# Altium PCB BINARY WATCH.PcbDoc
Units mm, origin at the board's own origin, x right, y up, seen from the top; angles counter-clockwise.
Board outline 40.05 x 54.05 mm, 2 copper layers (Top Layer, Bottom Layer); 32 components, 24 nets, 122 pads, 58 vias.
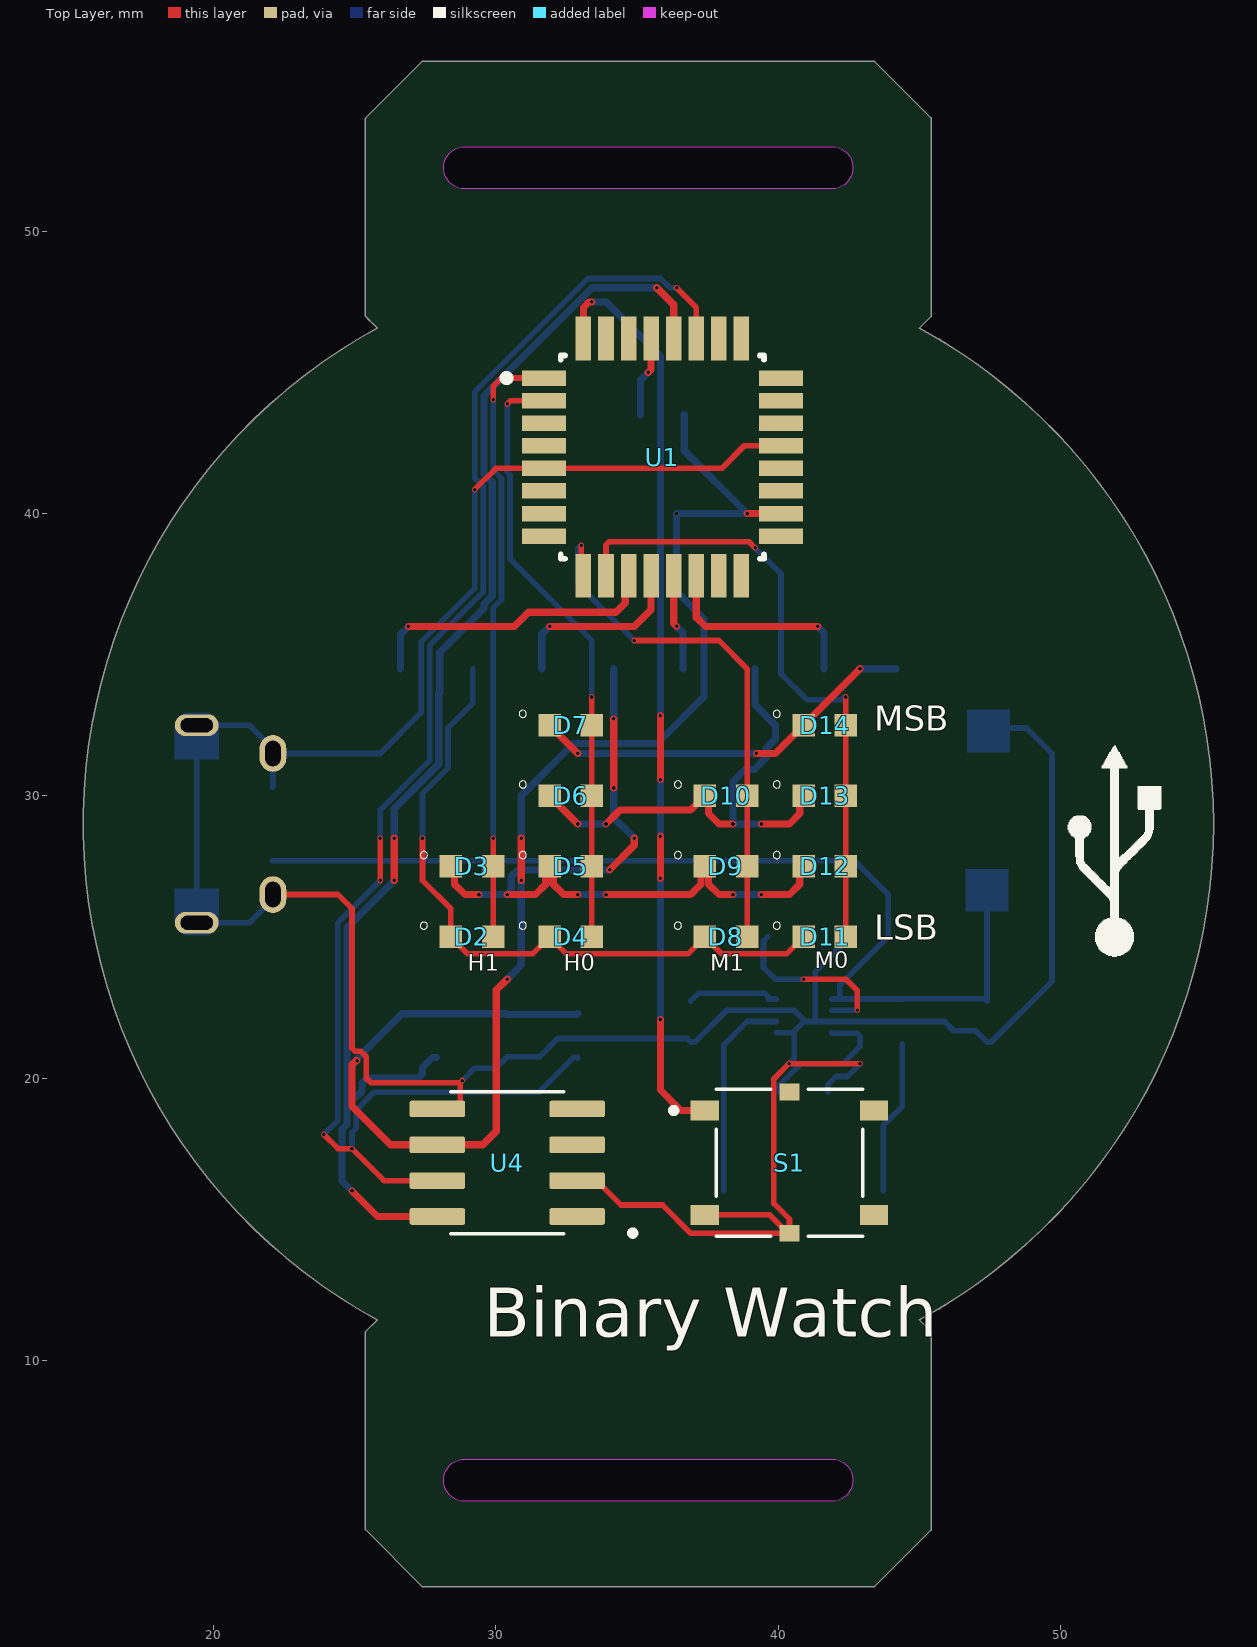
[diagram p0: Top Layer view]
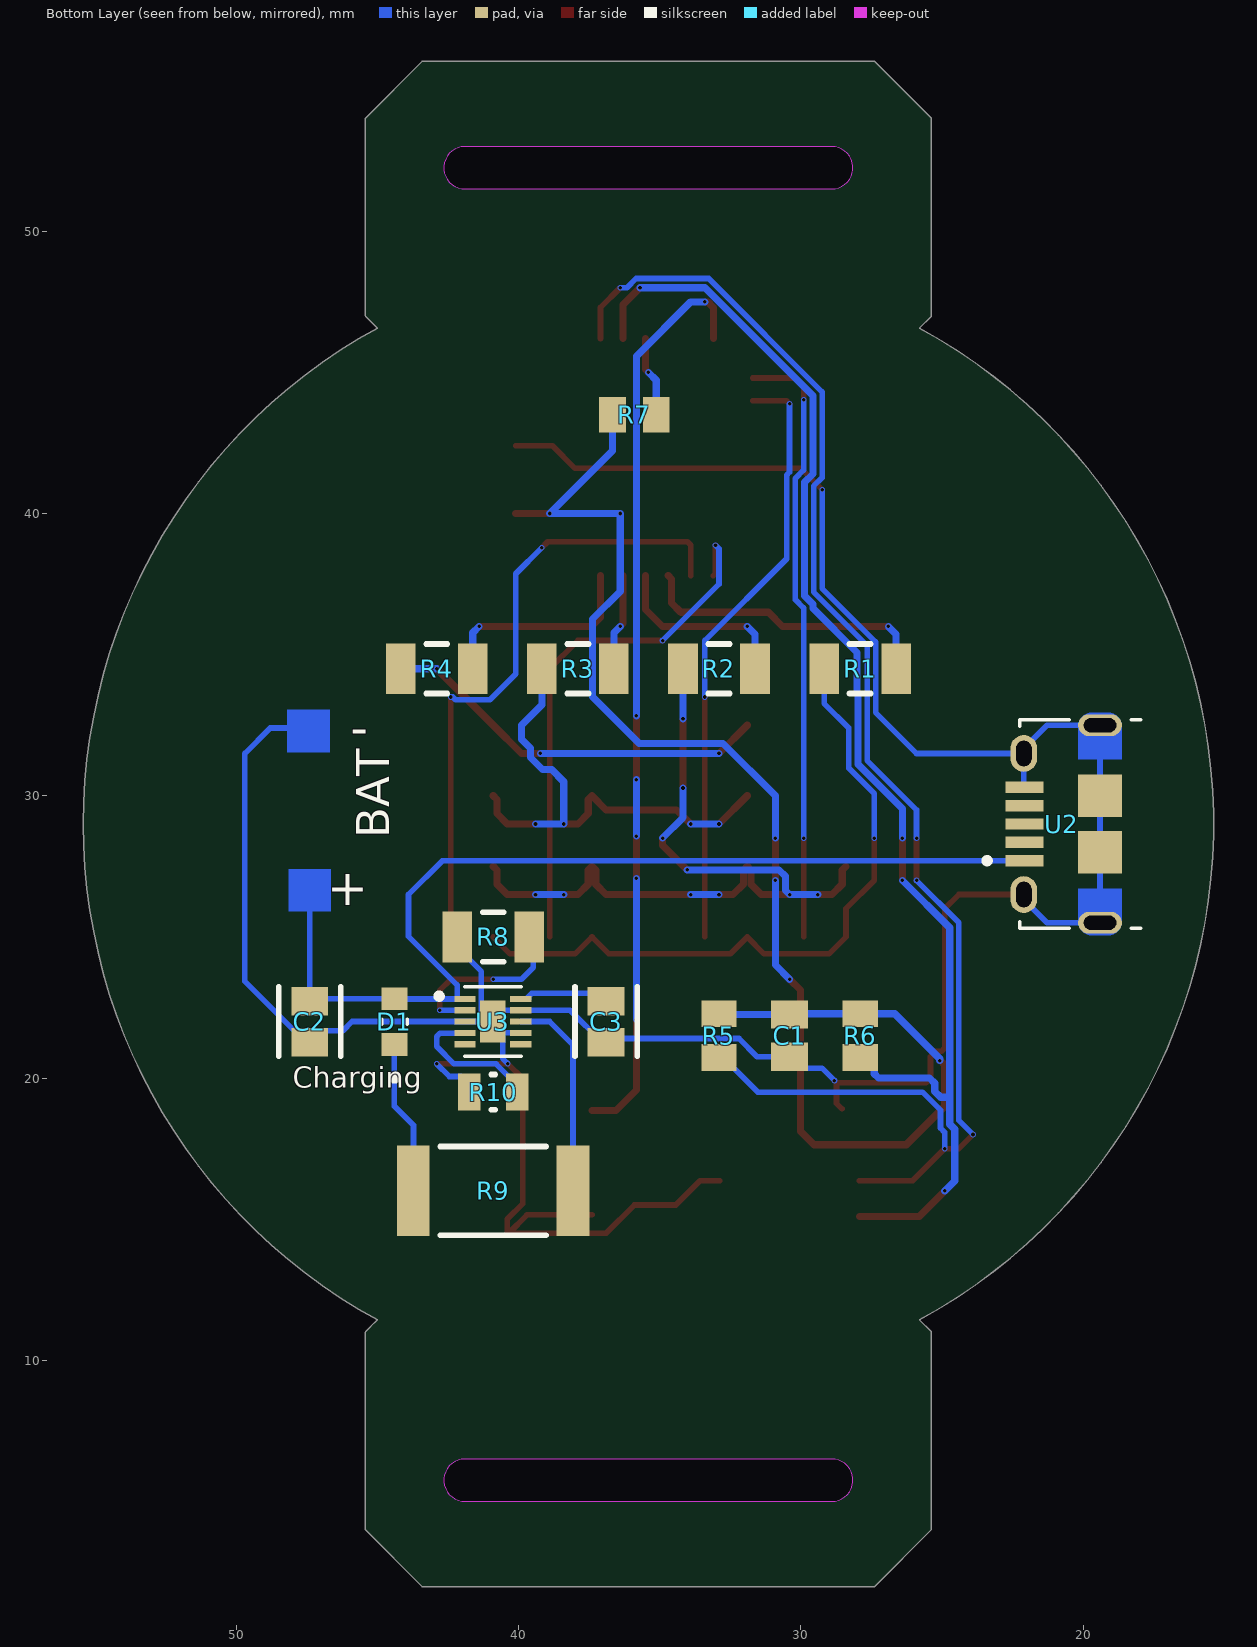
[diagram p1: Bottom Layer view, seen from below]
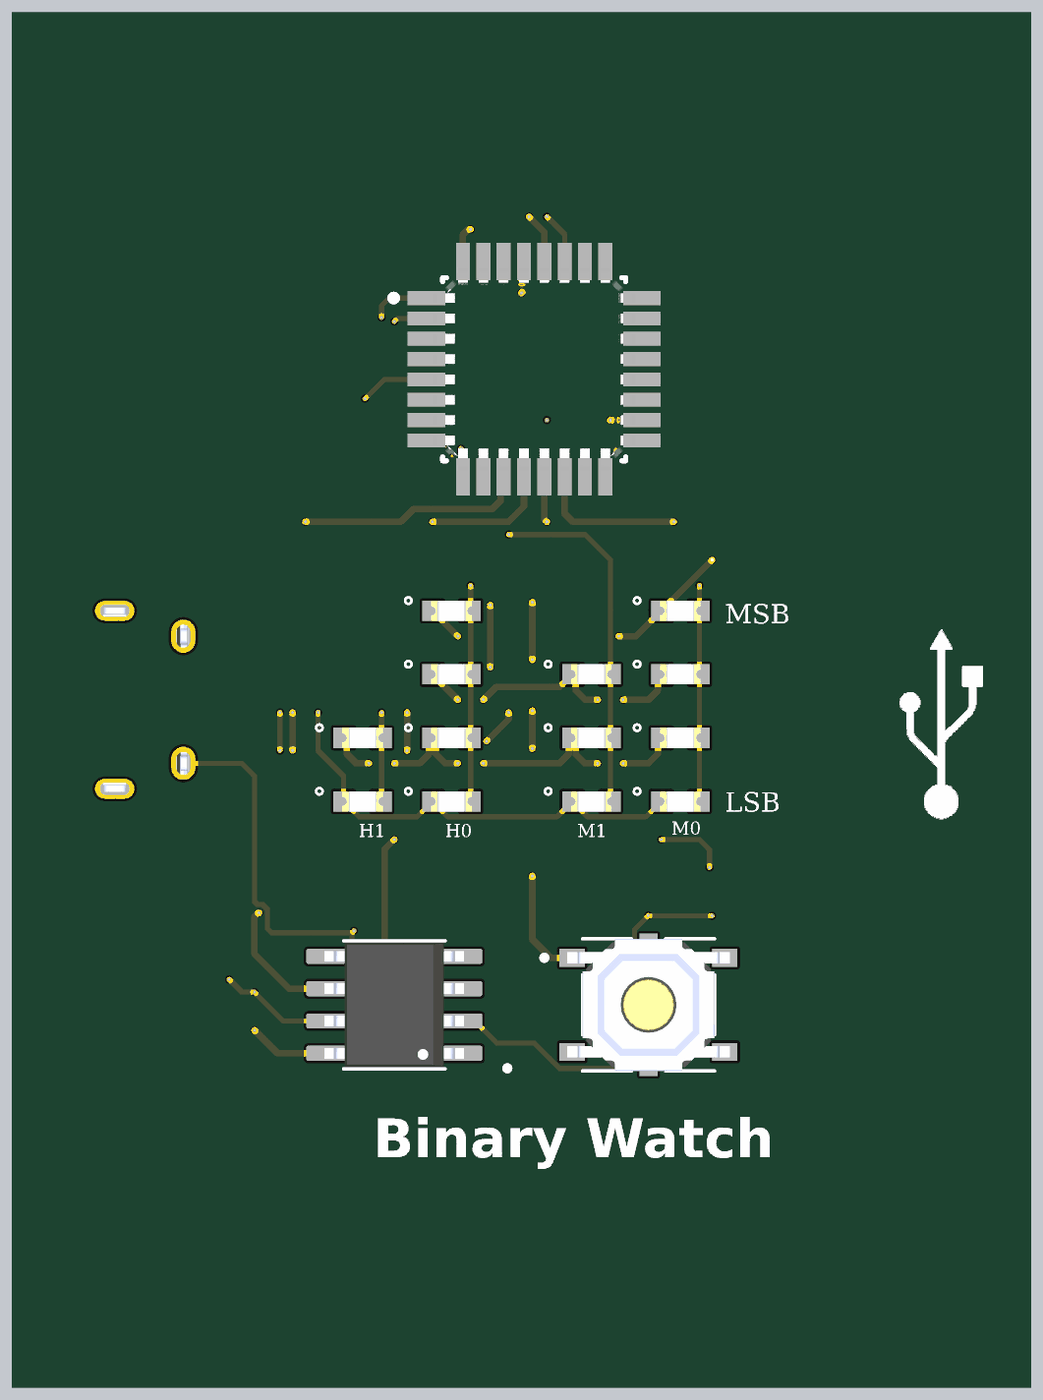
[diagram p2: 3D render of the assembled board from above, using the file's embedded part models]
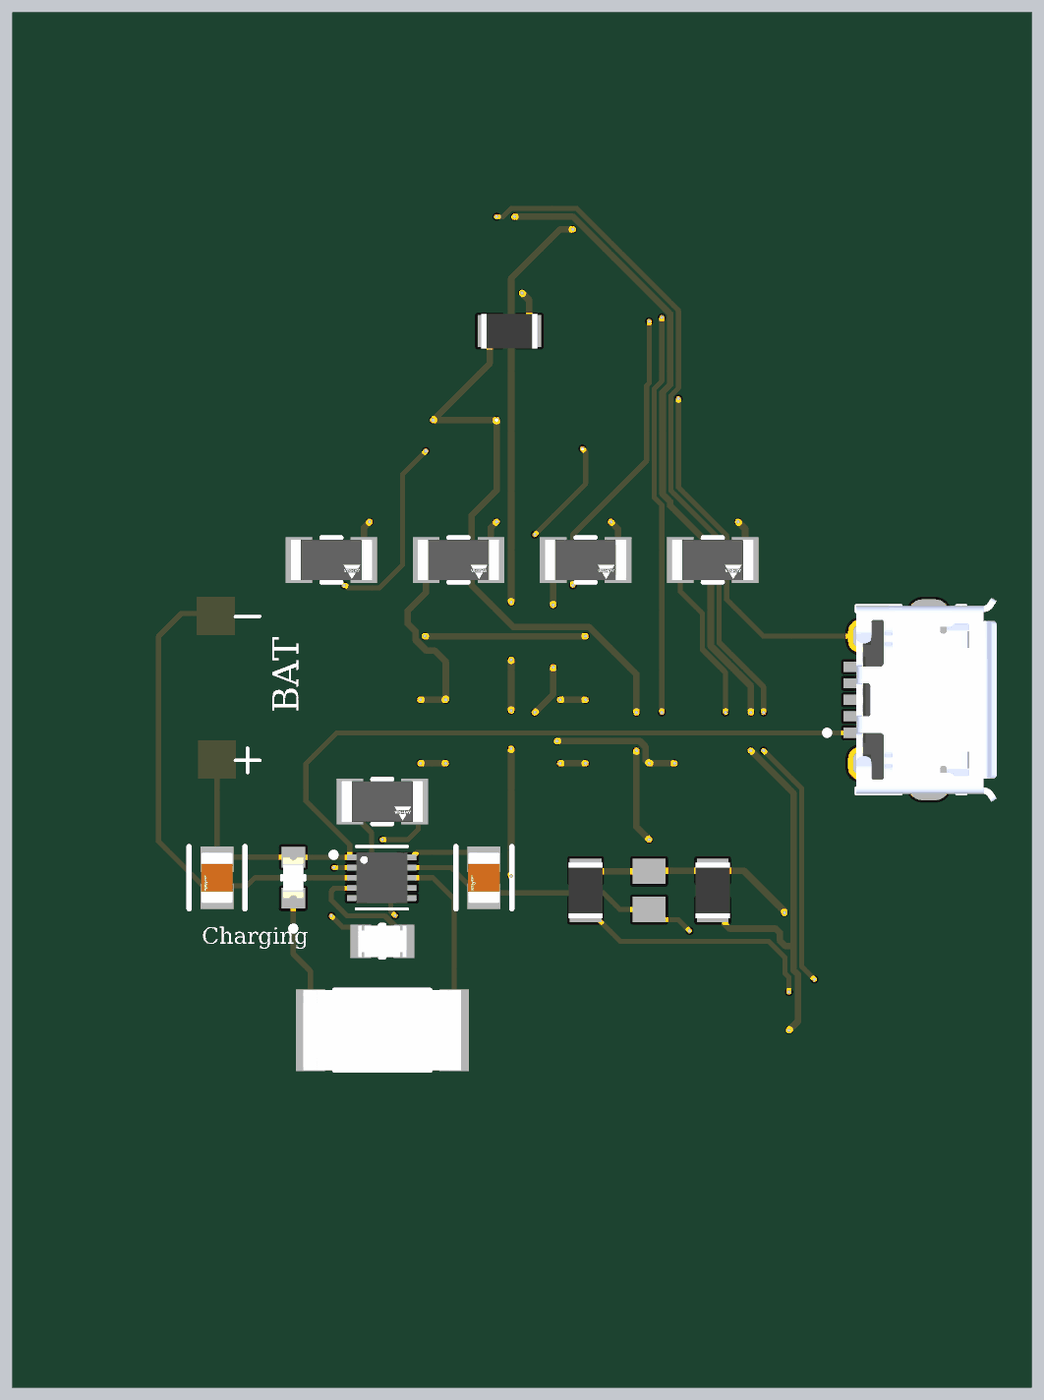
[diagram p3: 3D render of the assembled board from below, using the file's embedded part models]

## Layer stack, top to bottom
Top Solder: solder mask 0.0102, Solder Resist, Dk 3.5
Top Layer: signal copper 0.0356
Dielectric 1: dielectric 0.32, FR-4, Dk 4.8
Bottom Layer: signal copper 0.0356
Bottom Solder: solder mask 0.0102, Solder Resist, Dk 3.5

## Board outline
25.374,4 25.374,11 25.382,11.018 25.793,11.429 cw(c35.4,29) 25.793,46.571 25.382,46.982 25.532,46.832 25.374,47 25.374,54 25.382,54.018 27.382,56.018 27.4,56.026 43.4,56.026 43.418,56.018 45.418,54.018 45.426,54 45.426,47 45.418,46.982 45.007,46.571 cw(c35.4,29) 55.426,29 cw(c35.4,29) 45.007,11.429 45.243,11.193 45.268,11.168 45.418,11.018 45.426,11 45.426,4 45.418,3.982 43.418,1.982 43.4,1.974 27.4,1.974 27.382,1.982
cut-out: 28.9,5 cw(c28.9,5.75) 28.902,6.5 41.9,6.5 cw(c41.9,5.75) 41.898,5
cut-out: 28.9,51.5 cw(c28.9,52.25) 28.902,53 41.9,53 cw(c41.9,52.25) 41.898,51.5

## Design rules (kind name [scope] priority, off if disabled: settings)
Clearance [All] p1: gap=0.1 ignorepadtopadclearanceinfootprint=FALSE
PolygonConnect [All] p1: connectstyle=Relief reliefconductorwidth=0.254 reliefentries=4 polygonreliefangle="90 Angle" airgapwidth=0.254
RoutingVias [All] p1: holewidth=0.711 width=1.27 viastyle="Through Hole" minholewidth=0.1 minwidth=0.1 maxholewidth=0.711 maxwidth=1.27
SolderMaskExpansion [All] p1: expansion=0.102 istentingtop=FALSE
Width [All] p1: maxlimit=1 minlimit=0.2 preferedwidth=0.254
30 further rules are at their usual default settings.

## Components (designator, comment, footprint, x,y, rotation, side; value= is the part's Value field where it differs from the comment)
C1 "1u" CAPC2013X135X45LL10T25 30.4,21.5 r270 bottom
C2 "10u" FP-GCM21B-0_15-IPC_C 47.4,22 r270 bottom
C3 "10u" FP-GCM21B-0_15-IPC_C 36.9,22 r270 bottom
D1 "LTST-C190KRKT" LEDC1608X35N 44.4,22 r90 bottom
D2 "LTST-C190GKT" LEDM1608X80 29.15,25 r0 top locked
D3 "LTST-C190GKT" LEDM1608X80 29.15,27.5 r0 top locked
D4 "LTST-C190GKT" LEDM1608X80 32.65,25 r0 top locked
D5 "LTST-C190GKT" LEDM1608X80 32.65,27.5 r0 top locked
D6 "LTST-C190GKT" LEDM1608X80 32.65,30 r0 top locked
D7 "LTST-C190GKT" LEDM1608X80 32.65,32.5 r0 top locked
D8 "LTST-C190GKT" LEDM1608X80 38.15,25 r0 top locked
D9 "LTST-C190GKT" LEDM1608X80 38.15,27.5 r0 top locked
D10 "LTST-C190GKT" LEDM1608X80 38.15,30 r0 top locked
D11 "LTST-C190GKT" LEDM1608X80 41.65,25 r0 top locked
D12 "LTST-C190GKT" LEDM1608X80 41.65,27.5 r0 top locked
D13 "LTST-C190GKT" LEDM1608X80 41.65,30 r0 top locked
D14 "LTST-C190GKT" LEDM1608X80 41.65,32.5 r0 top locked
R1 "100" FP-CRCW1206-e3-MFG 27.9,34.5 r180 bottom
R2 "100" FP-CRCW1206-e3-MFG 32.9,34.5 r180 bottom
R3 "100" FP-CRCW1206-e3-MFG 37.9,34.5 r180 bottom
R4 "100" FP-CRCW1206-e3-MFG 42.9,34.5 r180 bottom
R5 "4.7" RESC2013X70X40LL20T20 32.9,21.5 r90 bottom
R6 "4.7" RESC2013X70X40LL20T20 27.9,21.5 r90 bottom
R7 "4.7" RESC2013X70X40LL20T20 35.9,43.5 r0 bottom
R8 "1.2k" FP-CRCW1206-e3-MFG 40.9,25 r180 bottom
R9 "1k" FP-CRCW2512-e3-IPC_C 40.9,16 r180 bottom
R10 "" FP-CRCW0805-e3-IPC_C 40.9,19.5 r180 bottom
S1 "" SW_PTS526_SMG15_SMTR2_LFS 40.4,17 r0 top locked
U1 "ATMEGA328PB-AUR" FP-C04-074-MFG 35.9,42 r0 top
U2 "10118194-0001LF" AMPHENOL_10118194-0001LF 19.4,29 r90 bottom locked
U3 "BQ24040DSQR" SON40P200X200X80-11N 40.915,22 r180 bottom
U4 "DS3231MZ+" SOIC127P600X175-8N 30.4,17 r180 top locked

## Footprints (in the part's own frame and the unit in brackets; to place one, negate y for a bottom-side part, rotate by r counter-clockwise, add the part's x,y. Pads: shape width x height; smd on the part's side, far side on the other; paste and mask are expansions set on the pad)
AMPHENOL_10118194-0001LF [mm]
  rect 0.4x1.35 smd: 1(-1.3,2.675) 2(-0.65,2.675) 3(0,2.675) 4(0.65,2.675) 5(1.3,2.675)
  oval 0.775x1.55 hole 0.5 slot 1.15 at 90 deg mask+0: SH1(-3.5,0) SH4(3.5,0)
  rect 1.5x1.55 smd: SH2(1,0) SH3(-1,0)
  oval 1.3x0.95 hole 0.55 slot 0.9 at 0 deg: SH5(-2.5,2.7) SH6(2.5,2.7)
  Top Layer region: 3.471,0.774 3.497,0.772 3.523,0.769 3.549,0.764 3.574,0.758 3.6,0.751 3.624,0.742 3.648,0.732 3.672,0.721 3.695,0.708 3.717,0.694 3.739,0.68 3.76,0.664 3.78,0.647 3.799,0.629 3.817,0.61 3.834,0.59 3.85,0.569 3.864,0.547 3.878,0.525 3.891,0.502 3.902,0.478 3.912,0.454 3.921,0.43 3.928,0.404 3.934,0.379 3.939,0.353 3.942,0.327 3.944,0.301 3.945,0.275 3.945,-0.275 3.944,-0.301 3.942,-0.327 3.939,-0.353 3.934,-0.379 3.928,-0.404 3.921,-0.43 3.912,-0.454 3.902,-0.478 3.891,-0.502 3.878,-0.525 3.864,-0.547 3.85,-0.569 3.834,-0.59 3.817,-0.61 3.799,-0.629 3.78,-0.647 3.76,-0.664 3.739,-0.68 3.717,-0.694 3.695,-0.708 3.672,-0.721 3.648,-0.732 3.624,-0.742 3.6,-0.751 3.574,-0.758 3.549,-0.764 3.523,-0.769 3.497,-0.772 3.471,-0.774 3.445,-0.775 2.3,-0.775 2.3,0.775 3.445,0.775
  Top Layer region: -2.3,-0.775 -3.445,-0.775 -3.471,-0.774 -3.497,-0.772 -3.523,-0.769 -3.549,-0.764 -3.574,-0.758 -3.6,-0.751 -3.624,-0.742 -3.648,-0.732 -3.672,-0.721 -3.695,-0.708 -3.717,-0.694 -3.739,-0.68 -3.76,-0.664 -3.78,-0.647 -3.799,-0.629 -3.817,-0.61 -3.834,-0.59 -3.85,-0.569 -3.864,-0.547 -3.878,-0.525 -3.891,-0.502 -3.902,-0.478 -3.912,-0.454 -3.921,-0.43 -3.928,-0.404 -3.934,-0.379 -3.939,-0.353 -3.942,-0.327 -3.944,-0.301 -3.945,-0.275 -3.945,0.275 -3.944,0.301 -3.942,0.327 -3.939,0.353 -3.934,0.379 -3.928,0.404 -3.921,0.43 -3.912,0.454 -3.902,0.478 -3.891,0.502 -3.878,0.525 -3.864,0.547 -3.85,0.569 -3.834,0.59 -3.817,0.61 -3.799,0.629 -3.78,0.647 -3.76,0.664 -3.739,0.68 -3.717,0.694 -3.695,0.708 -3.672,0.721 -3.648,0.732 -3.624,0.742 -3.6,0.751 -3.574,0.758 -3.549,0.764 -3.523,0.769 -3.497,0.772 -3.471,0.774 -3.445,0.775 -2.3,0.775
  silkscreen extent -3.7,-1.45 3.7,4.1, body extent -4.02,-2.68 4.02,2.85, height 2.67
CAPC2013X135X45LL10T25 [mm] "Chip Capacitor, 2-Leads, Body 2.00x1.25mm, IPC High Density"
  rect 1x1.3 smd: 1(-0.75,0) 2(0.75,0)
  body extent -1.05,-0.67 1.05,0.68, height 1.35
FP-C04-074-MFG [mm]
  rect 1.55x0.55 smd paste+0 mask+0: 1(-4.2,2.8) 2(-4.2,2) 3(-4.2,1.2) 4(-4.2,0.4) 5(-4.2,-0.4) 6(-4.2,-1.2) 7(-4.2,-2) 8(-4.2,-2.8) 17(4.2,-2.8) 18(4.2,-2) 19(4.2,-1.2) 20(4.2,-0.4) 21(4.2,0.4) 22(4.2,1.2) 23(4.2,2) 24(4.2,2.8)
  rect 0.55x1.55 smd paste+0 mask+0: 9(-2.8,-4.2) 10(-2,-4.2) 11(-1.2,-4.2) 12(-0.4,-4.2) 13(0.4,-4.2) 14(1.2,-4.2) 15(2,-4.2) 16(2.8,-4.2) 25(2.8,4.2) 26(2,4.2) 27(1.2,4.2) 28(0.4,4.2) 29(-0.4,4.2) 30(-1.2,4.2) 31(-2,4.2) 32(-2.8,4.2)
  silkscreen extent -5.65,-3.6 3.6,3.6, body extent -5.07,-5.07 5.07,5.07, height 0.25
FP-CRCW0805-e3-IPC_C [mil]
  rect 31.75x51.5 smd paste+0 mask+0: 1(-33.5,0) 2(33.5,0)
  silkscreen extent -3,-25 3,25, body extent -39,-25 39,25, height 20
FP-CRCW1206-e3-MFG [mm]
  rect 1.05x1.8 smd paste+0 mask+0: 1(-1.275,0) 2(1.275,0)
  silkscreen extent -0.38,-0.87 0.38,0.87, body extent -1.6,-0.8 1.6,0.8, height 0.6
FP-CRCW2512-e3-IPC_C [mm]
  rect 1.155x3.208 smd paste+0 mask+0: 1(-2.826,0) 2(2.826,0)
  silkscreen extent -1.87,-1.58 1.87,1.58, body extent -3.15,-1.58 3.15,1.58, height 0.7
FP-GCM21B-0_15-IPC_C [mm]
  rect 1.006x1.308 smd paste+0 mask+0: 1(-0.726,0) 2(0.726,0)
  silkscreen extent -1.23,-1.1 1.23,1.1, body extent -1,-0.63 1,0.63, height 1.4
LEDC1608X35N [mm]
  rect 0.81x0.93 smd: A(0.81,0) C(-0.81,0)
  silkscreen extent -2.1,-0.45 0.09,0.45, body extent -0.8,-0.4 0.8,0.4, height 0.8
LEDM1608X80 [mm]
  rect 0.8x0.8 smd: A(0.75,0) C(-0.75,0)
  silkscreen extent -1.83,0.27 -1.57,0.53, body extent -0.8,-0.4 0.8,0.4, height 0.8
RESC2013X70X40LL20T20 [mm] "Chip Resistor, 2-Leads, Body 2.2x1.35mm, IPC High Density"
  rect 0.95x1.25 smd: 1(-0.775,0) 2(0.775,0)
  body extent -1.1,-0.67 1.1,0.67, height 0.7
SOIC127P600X175-8N [mm]
  rrect25% 1.97x0.59 smd: 1(-2.475,1.905) 2(-2.475,0.635) 3(-2.475,-0.635) 4(-2.475,-1.905) 5(2.475,-1.905) 6(2.475,-0.635) 7(2.475,0.635) 8(2.475,1.905)
  silkscreen extent -4.54,-2.52 2,2.59, body extent -3,-2.45 3,2.45, height 1.51
SON40P200X200X80-11N [mm]
  rect 0.76x0.22 smd: 1(-0.985,0.8) 2(-0.985,0.4) 3(-0.985,0) 4(-0.985,-0.4) 5(-0.985,-0.8) 6(0.985,-0.8) 7(0.985,-0.4) 8(0.985,0) 9(0.985,0.4) 10(0.985,0.8)
  rect 0.9x1.5 smd paste-2: 11(0,0)
  silkscreen extent -2,-1.23 1,1.23, body extent -1,-1 1,1, height 0.76
SW_PTS526_SMG15_SMTR2_LFS [mm]
  rect 1x0.7 smd: 1(-3,1.85) 2(3,1.85) 3(-3,-1.85) 4(3,-1.85)
  rect 0.7x0.6 smd: G1(0,2.5) G2(0,-2.5)
  silkscreen extent -4.2,-2.6 2.6,2.6, body extent -3.2,-2.6 3.2,2.6, height 1.7

## Part data
C1: library part CMP-2007-03460-1, Manufacturer=Murata, Part Number=GRM21BR71C105KA01K
C2 C3: library part CMP-2007-03335-2, "Ceramic Capacitor for Automotive 10uF ±10% 6.3VDC X7R 0805 Embossed T/R", Capacitance=10uF, Case Code (Imperial)=0805, Case Code (Metric)=2012, Dielectric=X7R, Max Operating Temperature=125°C, Min Operating Temperature=-55°C, Package Quantity=1, Ratings=AEC-Q200, Tolerance=10%, Voltage=6.3V, Case/Package=0805, Depth=1.25mm, Height=1.25mm, Lead Free="Lead Free", Length=2mm, Mount="Surface Mount", Packaging="Tape and Reel", Radiation Hardening=No, REACH SVHC="No SVHC", Termination=SMD/SMT, Thickness=0.055inch, Voltage Rating=6.3V, Voltage Rating (DC)=6.3V, Width=0.049inch
D1: "Red 631nm LED Indication - Discrete 2V 0603 (1608 Metric)", Package="0603 Lite-On", Availability="In Stock", Check_prices=https://www.snapeda.com/parts/LTST-C190KRKT/Lite-On+Inc./view-part/?ref=eda, MF="Lite-On Inc.", MP=LTST-C190KRKT, Price=None, Purchase-URL=https://pricing.snapeda.com/search/part/LTST-C190KRKT/?ref=eda, SnapEDA_Link=https://www.snapeda.com/parts/LTST-C190KRKT/Lite-On+Inc./view-part/?ref=snap
D2 D3 D4 D5 D6 D7 D8 D9 D10 D11 D12 D13 D14: "Green 1.6 x 0.8 x 0.8 mm 130Â° Water Clear 6 mcd 2.1 V SMT LED", Package=None, Availability=Unavailable, MP=LTST-C190GKT, Price=None
R1 R2 R3 R4: library part CMP-2003-04801-2, "RES Thick Film, 100Ω, 1%, 0.25W, 100ppm/°C, 1206", Case Code (Imperial)=1206, Case Code (Metric)=3216, Max Operating Temperature=155°C, Min Operating Temperature=-55°C, Package Quantity=5000, Power Rating=250mW, Resistance=100R, Temperature Coefficient=100ppm/°C, Tolerance=1%, Voltage Rating=200V, Case/Package=1206, Composition="Thick Film", Contact Plating=Tin, Depth=1.6mm, Height=0.55mm, Lead Free="Lead Free", Length=3.2mm, Military Standard=Not, Mount="Surface Mount", Number of Pins=2, Packaging="Tape and Reel", Radiation Hardening=No, Termination=SMD/SMT, Voltage Rating (DC)=200V, Weight=0.000353oz, Width=1.6mm
R5 R6 R7: library part CMP-1665-00033-1, "Chip Resistor, 4.7 Ohm, +/- 1%, 125 mW, -55 to 125 degC, 0805 (2012 Metric), RoHS, Tape and Reel", Case Code (Imperial)=0805, Case Code (Metric)=2012, Max Operating Temperature="125 degC", Min Operating Temperature="-55 degC", Package Quantity=5000, PartNumber=ERJ-6RQF4R7V, Power Rating="125 mW", Resistance="4.7 Ohm", Tolerance=1%, Case\/Package=0805, ComponentLink1Description="Manufacturer URL", ComponentLink1URL=http://www.panasonic.com/, ComponentLink2Description=Datasheet, ComponentLink2URL=http://industrial.panasonic.com/cdbs/www-data/pdf/RDA0000/AOA0000C86.pdf, DatasheetVersion=04/2015, Height="0.028 inch", Length="0.079 inch", Mount="Surface Mount", Mounting Technology="Surface Mount", PackageDescription="2-Pin Surface Mount Device, Body 2 x 1.5 mm", PackageReference=0805, Packaging="Tape and Reel", Pins=2, Radiation Hardening=No, REACH SVHC="No SVHC", RoHSCompliant=true, Width="0.049 inch"
R8: library part CMP-2003-01876-2, "RES Thick Film, 1.2kΩ, 1%, 0.25W, 100ppm/°C, 1206", Case Code (Imperial)=1206, Case Code (Metric)=3216, Max Operating Temperature=155°C, Max Power Dissipation=250mW, Min Operating Temperature=-55°C, Package Quantity=10, Resistance=1.2kR, Temperature Coefficient=100ppm/°C, Tolerance=1%, Voltage Rating=200V, Case/Package=1206, Composition="Thick Film", Contact Plating=Tin, Depth=1.6mm, Features="Automotive AEC-Q200", Height=0.55mm, Lead Free="Lead Free", Length=3.2mm, Military Standard=Not, Number of Terminations=2, Packaging="Tape and Reel", Power Rating=250mW, Radiation Hardening=No, Termination=SMD/SMT, Voltage Rating (DC)=200V, Weight=0.000353oz, Width=0.063inch, Working Voltage=200V
R9: library part CMP-02407-005880-1, "RES Thick Film, 1kΩ, 1%, 1W, 100ppm/°C, 2512", Case Code (Imperial)=2512, Case Code (Metric)=6432, Max Operating Temperature=155°C, Max Power Dissipation=1W, Min Operating Temperature=-55°C, Package Quantity=10, Resistance=1kR, Temperature Coefficient=100ppm/°C, Tolerance=1%, Voltage Rating=500V, Case/Package=2512, Composition="Thick Film", Contact Plating=Tin, Depth=3.15mm, Features="Automotive AEC-Q200", Height=0.6mm, Lead Free="Lead Free", Length=6.3mm, Military Standard=Not, Mount="Surface Mount", Number of Pins=2, Number of Terminations=2, Packaging="Tape and Reel", Power Rating=1W, Radiation Hardening=No, Termination=SMD/SMT, Voltage Rating (DC)=500V, Weight=0.001429oz, Width=3.15mm
R10: library part CMP-2001-04910-2, "RES Thick Film, 10kΩ, 5%, 0.125W, 200ppm/°C, 0805", Case Code (Imperial)=0805, Case Code (Metric)=2012, Max Operating Temperature=155°C, Min Operating Temperature=-55°C, Package Quantity=5000, Power Rating=125mW, Resistance=10kR, Temperature Coefficient=200ppm/°C, Tolerance=5%, Voltage Rating=150V, Case/Package=0805, Composition="Thick Film", Contact Plating=Tin, Depth=1.25mm, Height=0.45mm, Lead Free="Lead Free", Length=2mm, Military Standard=Not, Mount="Surface Mount", Packaging="Tape and Reel", Radiation Hardening=No, Termination=SMD/SMT, Voltage Rating (DC)=150V, Weight=0.000194oz, Width=1.25mm
S1: library part PTS526_SMG15_SMTR2_LFS, "Tactile Switch SPST-NO Top Actuated Surface Mount", Package=None, Availability="In Stock", Check_prices=https://www.snapeda.com/parts/PTS526%20SMG15%20SMTR2%20LFS/C%2526K/view-part/?ref=eda, MF=C&K, MP="PTS526 SMG15 SMTR2 LFS", Price=None, Purchase-URL="https://pricing.snapeda.com/search/part/PTS526 SMG15 SMTR2 LFS/?ref=eda", SnapEDA_Link=https://www.snapeda.com/parts/PTS526%20SMG15%20SMTR2%20LFS/C%2526K/view-part/?ref=snap
U1: library part CMP-06276-000006-1, "IC MCU 8BIT 32KB FLASH 32TQFP", Frequency=20MHz, Manufacturer=Microchip, Max Supply Voltage=5.5V, Min Supply Voltage=1.8V, Nominal Supply Current=0.06-5.2mA, Package=C04-074, Temperature="-40°C to +85°C", Temperature Range High=+85°C, Temperature Range Low=-40°C, Automotive=No, Category=IC, ComponentLink2Description=Datasheet, ComponentLink2URL=http://ww1.microchip.com/downloads/en/DeviceDoc/40001906C.pdf, Core Architecture=AVR, Data Bus Width=8bits, Device Class L1="Integrated Circuits (ICs)", Device Class L2="Embedded Processors and Controllers", Device Class L3=Microcontrollers, Digikey Description="IC MCU 8BIT 32KB FLASH 32TQFP", Footprint Url=https://ww1.microchip.com/downloads/en/DeviceDoc/32L_TQFP_7x7x1_0mm_PT_C04-00074c.pdf, Height=1.2mm, Interface=I2C,SPI,UART,USART,2-Wire, Ipc Land Pattern Name=QFP80P900X900X120-32, Lead Free=Yes, Manufacturer Part Number=ATMEGA328PB-AUR, Memory Size=32KBytes, Memory Type=FLASH, Number Of A/D Converters=1, Number Of Adc Channels=8, Number Of Cores=1, Number Of I2C Channels=2, Number Of I/Os=27, Number Of Pwm Channels=10, Number Of Spi Channels=2, Number Of Timers/Counters=5, Number Of Uart Channels=2, Octopart=https://octopart.com/atmega328pb-aur-microchip-77760229, Ram Size=2KBytes, RoHS=TRUE, Standoff Height=0.05mm
U2: "Micro USB, Input Output Connectors, B TYPE RECEPTACLE with flange", Package=None, Check_prices=https://www.snapeda.com/parts/10118194-0001LF/Amphenol+FCI/view-part/?ref=eda, MF="Amphenol ICC", MP=10118194-0001LF, SnapEDA_Link=https://www.snapeda.com/parts/10118194-0001LF/Amphenol+FCI/view-part/?ref=snap
U3: "Standalone 1-cell 1-A linear battery charger with 4.2-V VBAT and Temperature Sensing 10-WSON 0 to 125", Package="WSON-10 Texas Instruments", Digi-Key_Part_Number=296-37142-1-ND, DigiKey-Purchase-URL=https://snapeda.com/shop?store=DigiKey&id=229310, MF="Texas Instruments", Mouser-Purchase-URL=https://snapeda.com/shop?store=Mouser&id=229310, MP=BQ24040DSQR, SnapEDA_Link=https://www.snapeda.com/parts/BQ24040DSQR/Texas%20Instruments/view-part/229310/?ref=snap, Texas_Instruments-Purchase-URL=https://snapeda.com/shop?store=Texas+Instruments&id=229310
U4: "Real Time Clock _RTC_ IC Clock/Calendar IÂ²C, 2-Wire Serial 8-SOIC _0.154, 3.90mm Width_", Package="SOIC-8 Maxim Integrated", Availability=Unavailable, MF="Maxim Integrated", MP=DS3231MZ, Price=None, SnapEDA_Link=https://www.snapeda.com/parts/DS3231MZ/Maxim%20Integrated/view-part/2834343/?ref=snap

## Via types
v1: diameter 0.127, hole 0.127, Top Layer to Bottom Layer, 58 vias

## Nets (pads, with @x,y where several pads share a name; then routed paths per layer and width w, separated by ;. In a path a pad name is that pad's centre, name@x,y a point inside that pad or via, vN(x,y) a via of type N, cw(c..) or ccw(c..) an arc to the next point about the centre after c; other vN are vias at no path point)
+5V: C2.1 D1.A U2.1 U3.1 | length 36.1
  Bottom Layer w0.2: U2.1 42.7,27.7 43.9,26.5 43.9,25.017 42.18,23.297 42.18,22.81 U3.1@42.17,22.8 ; U3.1 U3.1@42.17,22.8 ; 47.4,26.5 C2.1 47.316,22.81 D1.A 44.39,22.8 U3.1@42.17,22.8
BIT1: R1.2 U1.11 | length 10.7
  Top Layer w0.254: v1(26.9,36) 30.65,36 31.15,36.5 34.251,36.5 34.585,36.834 34.585,37.685 U1.11
  Bottom Layer w0.254: R1.2 26.625,35.725 v1(26.9,36)
BIT2: R2.2 U1.12 | length 6.7
  Top Layer w0.254: v1(31.9,36) 34.9,36 35.5,36.6 U1.12
  Bottom Layer w0.254: R2.2 31.625,35.725 v1(31.9,36)
BIT3: R3.2 U1.13 | length 3.4
  Top Layer w0.254: U1.13 36.3,36.1 v1(36.4,36)
  Bottom Layer w0.254: v1(36.4,36) 36.625,35.775 R3.2
BIT4: R4.2 U1.14 | length 7.5
  Top Layer w0.254: U1.14 37.1,36.322 37.422,36 v1(41.4,36)
  Bottom Layer w0.254: v1(41.4,36) 41.625,35.775 R4.2
GND: C1.2 C2.2 C3.2 R8.1 R10.1 S1.3 S1.G2 U1.5 U1.21 U2.5 U2.SH1 U2.SH2 U2.SH3 U2.SH4 U2.SH5 U2.SH6 U3.3 U3.7 U3.9 U3.11 U4.2 U4.5 | length 117.1
  Top Layer w0.2: U2.SH1 U2.SH1@19.787,25.5 ; U2.SH5 24.4,26.5 24.9,26 24.9,21.062 25.017,20.944 25.216,20.944 25.408,20.753 25.408,19.992 25.564,19.836 28.736,19.836 ; U4.5@28.541,18.905 28.736,19.1 28.736,19.836 ; v1(28.81,19.91) 28.736,19.836 ; v1(29.246,40.846) 30,41.6 U1.5 38,41.6 38.8,42.4 U1.21 ; U4.2 33.565,16.365 34.43,15.5 35.9,15.5 36.9,14.5 S1.G2@40.35,14.5 ; S1.3 39.7,15.15 S1.G2@40.35,14.5 ; v1(42.9,20.5) 40.4,20.5 v1(40.388,20.512) 39.85,19.974 39.85,15.55 40.4,15 S1.G2 S1.G2@40.35,14.5
  Bottom Layer w0.2: U2.5 22.1,30.325 U2.SH6 ; U2.SH5 22.1,26.325 21.275,25.5 U2.SH1 U2.SH3 U2.SH2 U2.SH4 21.275,32.5 22.1,31.675 U2.SH6 ; v1(28.81,19.91) 29.25,20.35 30,20.35 C1.2 31.542,20.75 32.192,21.4 36.774,21.4 C3.2 37.051,21.274 38.177,22.4 U3.9 40.565,22.4 40.915,22.05 U3.11 ; v1(29.246,40.846) 29.246,37.346 27.35,35.45 27.35,32.95 25.9,31.5 U2.SH6 ; U3.7 U3.11@40.565,21.6 ; v1(40.388,20.512) 40.565,20.689 U3.11@40.565,21.6 ; R10.1 41.751,19.751 42.054,20.054 42.454,20.054 v1(42.9,20.5) ; R8.1 42.175,24.625 41.32,23.77 41.32,22.088 41.408,22 ; 47.3,32.4 48.8,32.4 49.7,31.5 49.7,23.423 47.551,21.274 C2.2 46.997,21.677 46.223,21.677 45.9,22 U3.3 41.408,22 ; U3.11@40.565,21.6 40.565,21.65 U3.11 ; U3.11 41.408,22
H0: D4.A D5.A D6.A D7.A U1.2 | length 21.5
  Top Layer w0.2: v1(30.4,43.883) 30.517,44 U1.2 ; D4.A D5.A D6.A D7.A v1(33.4,33.5)
  Bottom Layer w0.2: v1(30.4,43.883) 30.4,41.465 30.5,41.365 30.5,38.4 33.4,35.5 v1(33.4,33.5)
H1: D2.A D3.A U1.1 | length 21.7
  Top Layer w0.2: D2.A D3.A v1(29.9,28.5) ; v1(29.9,44.038) 29.9,44.5 30.2,44.8 U1.1
  Bottom Layer w0.2: v1(29.9,28.5) 29.9,36.5 29.9,36.651 30.2,36.951 30.2,41.241 29.9,41.541 v1(29.9,44.038)
M0: D11.A D12.A D13.A D14.A U1.10 | length 22.6
  Top Layer w0.2: U1.10 33.9,38.883 34.017,39 38.967,39 v1(39.184,38.784) ; D11.A D12.A D13.A D14.A v1(42.4,33.5)
  Bottom Layer w0.2: v1(39.184,38.784) 40.1,37.867 40.1,34.317 41.017,33.4 42.233,33.4 42.333,33.5 v1(42.4,33.5)
M1: D8.A D9.A D10.A U1.9 | length 19.3
  Top Layer w0.2: v1(33.025,38.875) 33.025,37.875 U1.9 ; v1(34.9,35.5) 37.9,35.5 38.9,34.5 D10.A D9.A D8.A
  Bottom Layer w0.2: v1(33.025,38.875) 32.9,38.75 32.9,37.5 v1(34.9,35.5)
NetC3_1: C3.1 U3.10 | length 3.3
  Bottom Layer w0.2: C3.1 37.174,23 39.533,23 39.65,22.883 39.65,22.81 39.66,22.8 U3.10
NetD1_C: D1.C R9.1 | length 5.5
  Bottom Layer w0.2: R9.1 43.726,18.326 44.4,19 D1.C
NetD2_C: D2.C D4.C D8.C D11.C R1.1 | length 24.6
  Top Layer w0.2: v1(27.4,28.5) 27.4,27 28.4,26 D2.C 29,24.4 31.3,24.4 D4.C 32.5,24.4 36.8,24.4 D8.C 38,24.4 40.3,24.4 D11.C
  Bottom Layer w0.2: v1(27.4,28.5) 27.4,30.075 28.304,30.979 28.304,32.404 29.175,33.275 R1.1
NetD3_C: D3.C D5.C D9.C D12.C R2.1 | length 28.8
  Top Layer w0.254: D3.C 28.532,27.368 28.532,26.868 28.9,26.5 v1(29.4,26.5) ; v1(30.4,26.5) 31.4,26.5 31.768,26.868 31.768,27.368 D5.C 32.032,27.368 32.032,26.868 32.4,26.5 v1(32.9,26.5) ; v1(33.9,26.5) 36.9,26.5 37.268,26.868 37.268,27.368 D9.C 37.532,27.368 37.532,26.868 37.9,26.5 v1(38.4,26.5) ; v1(34.027,27.373) 34.9,28.246 v1(34.9,28.5) ; v1(34.175,30.276) v1(34.175,32.725) ; v1(39.4,26.5) 40.4,26.5 40.768,26.868 40.768,27.368 D12.C
  Bottom Layer w0.254: v1(29.4,26.5) v1(30.4,26.5) 30.546,26.646 30.546,27.147 30.772,27.373 v1(34.027,27.373) ; v1(32.9,26.5) v1(33.9,26.5) ; v1(34.175,30.276) 34.175,29.225 v1(34.9,28.5) ; v1(34.175,32.725) R2.1 ; v1(38.4,26.5) v1(39.4,26.5)
NetD6_C: D6.C D10.C D13.C R3.1 | length 17.9
  Top Layer w0.254: D6.C v1(32.9,29) ; v1(33.9,29) 34.296,29.396 ; 34.296,29.396 34.401,29.5 36.9,29.5 D10.C 37.532,29.868 37.532,29.368 37.9,29 v1(38.4,29) ; v1(39.4,29) 40.4,29 40.768,29.368 40.768,29.868 D13.C
  Bottom Layer w0.254: v1(32.9,29) v1(33.9,29) ; R3.1 39.175,33.225 39.9,32.5 39.9,32 39.581,31.681 39.581,31.353 39.154,30.927 38.827,30.927 38.4,30.5 v1(38.4,29) v1(39.4,29)
NetD7_C: D7.C D14.C R4.1 | length 13.9
  Top Layer w0.254: D7.C v1(32.9,31.5) ; v1(39.227,31.5) 39.9,31.5 D14.C v1(42.9,34.5)
  Bottom Layer w0.254: v1(32.9,31.5) v1(39.227,31.5) ; v1(42.9,34.5) R4.1
NetR8_2: R8.2 U3.2 | length 6.4
  Top Layer w0.2: v1(40.9,23.5) 42.4,23.5 42.8,23.1 v1(42.8,22.4)
  Bottom Layer w0.2: R8.2 39.483,24.858 39.483,23.917 39.9,23.5 v1(40.9,23.5) ; U3.2 v1(42.8,22.4)
NetR9_2: R9.2 U3.8 | length 7.4
  Bottom Layer w0.2: R9.2 38.074,21.174 38.9,22 U3.8
NetR10_2: R10.2 U3.4 | length 5.1
  Bottom Layer w0.2: R10.2 40.049,19.751 40.352,20.054 40.354,20.054 40.8,20.5 42.283,20.5 42.9,21.117 42.9,21.473 42.783,21.59 41.91,21.59 U3.4
NetS1_1: S1.1 U1.32 | length 32.6
  Top Layer w0.254: U1.32 33.1,47.3 33.3,47.5 v1(33.401,47.5) ; v1(35.827,22.073) 35.827,19.573 36.55,18.85 S1.1 ; v1(35.827,27.073) v1(35.827,28.573) ; v1(35.827,30.573) v1(35.827,32.838)
  Bottom Layer w0.254: v1(33.401,47.5) 33.9,47.5 35.827,45.573 v1(35.827,32.838) ; v1(35.827,22.073) v1(35.827,27.073) ; v1(35.827,28.573) v1(35.827,30.573)
RST: R7.1 U1.29 | length 2.9
  Top Layer w0.254: v1(35.4,45) 35.5,45.1 U1.29
  Bottom Layer w0.254: R7.1 35.125,44.725 v1(35.4,45)
SCL: R6.1 U1.28 U4.8 | length 47.9
  Top Layer w0.254: v1(24.9,16) 25.805,15.095 U4.8 ; v1(26.4,27) v1(26.4,28.5) ; v1(35.7,48) 36.3,47.4 U1.28
  Bottom Layer w0.254: 24.727,19.289 24.757,19.319 25.047,19.319 25.254,19.526 25.254,19.816 25.438,20 27.251,20 27.4,20.149 27.4,20.225 27.402,20.227 27.402,20.377 27.75,20.725 R6.1 ; v1(24.9,16) 24.546,16.354 24.546,18.184 24.727,18.365 24.727,25.327 v1(26.4,27) ; v1(26.4,28.5) 26.4,29.538 27.977,31.115 27.977,33.615 28.01,33.648 28.01,35.081 29.573,36.644 29.573,36.786 29.873,37.086 29.873,41.106 29.573,41.406 29.573,44.173 33.4,48 v1(35.7,48)
SDA: R5.1 U1.27 U4.7 | length 54.6
  Top Layer w0.2: v1(23.9,18) 24.4,17.5 v1(24.9,17.5) 26.035,16.365 U4.7 ; v1(25.9,27) v1(25.9,28.5) ; v1(36.4,48) 37.1,47.3 U1.27
  Bottom Layer w0.2: v1(23.9,18) 24.4,18.5 24.4,25.5 v1(25.9,27) ; v1(24.9,17.5) 24.9,18.075 25.054,18.229 25.054,18.864 25.69,19.5 31.525,19.5 32.75,20.725 R5.1 ; v1(25.9,28.5) 25.9,29.5 27.65,31.25 27.65,35.326 29.546,37.222 29.546,40.97 29.246,41.27 29.246,44.308 33.265,48.327 35.835,48.327 36.162,48 v1(36.4,48)
VCC: C1.1 R5.2 R6.2 R7.2 U1.18 U4.6 | length 51.4
  Top Layer w0.254: v1(25.081,20.617) 25.049,20.617 24.9,20.469 24.9,19 26.265,17.635 U4.6 29.535,17.635 30.014,18.114 30.014,23.114 v1(30.4,23.5) ; v1(30.9,27) v1(30.9,28.5) ; v1(38.9,40) U1.18
  Bottom Layer w0.254: v1(25.081,20.617) 25.081,20.681 26.675,22.275 R6.2 30.375,22.275 C1.1 32.875,22.25 R5.2 ; v1(30.4,23.5) 30.9,24 v1(30.9,27) ; v1(30.9,28.5) 30.9,30.001 32.753,31.854 35.725,31.854 37.377,33.506 37.377,36.264 36.4,37.241 v1(36.4,40) v1(38.9,40) 36.675,42.225 R7.2
pads on no net: S1.2 S1.4 S1.G1 U1.3 U1.4 U1.6 U1.7 U1.8 U1.15 U1.16 U1.17 U1.19 U1.20 U1.22 U1.23 U1.24 U1.25 U1.26 U1.30 U1.31 U2.2 U2.3 U2.4 U3.5 U3.6 U4.1 U4.3 U4.4

## Other copper
Bottom Layer:
  region net GND: 48.2,33.05 46.7,33.05 46.7,31.55 48.2,31.55
  region net +5V: 48.15,27.4 46.65,27.4 46.65,25.9 48.15,25.9

## Silkscreen, mask and mechanical layers (free items; w line width, h text height)
Top Overlay:
  region: 478 vertices and 0 holes, not listed, extent 50.267,24.3 53.567,31.767
  text "MSB" at 43.4,32 h1.5
  text "LSB" at 43.4,24.6 h1.5
  text "M0" at 41.3,23.7 h1
  text "H1" at 29,23.6 h1
  text "H0" at 32.4,23.6 h1
  text "M1" at 37.6,23.6 h1
  text "Binary Watch" at 29.566,10.249 h3
Bottom Overlay:
  text "-" at 45.327,31.783 h1.27
  text "BAT" at 44.2,28.5 h2 r270
  text "+" at 45.327,26.127 h1.27
  text "Charging" at 48,19.403 h1.27
Mechanical 1:
  lines w0.051: 25.8,11.4 25.9,11.5 25.6,11.2 25.5,11.1 25.4,11 25.4,4 27.4,2 43.4,2 45.4,4 45.4,11 45.3,11.1 45.25,11.15 45.225,11.175 44.9,11.5 45.15,11.25 45.1,11.3 45,11.4 ; 25.8,46.6 25.7,46.7 25.65,46.75 25.9,46.5 25.4,47 ; 25.823,46.558 ccw(c35.4,29) 25.858,11.423 ccw(c35.4,29) 44.942,11.423 ; 25.858,46.577 cw(c35.4,29) 44.942,46.577 cw(c35.4,29) 44.977,11.442 ; 28.9,6.5 41.9,6.5 cw(c41.9,5.75) 41.898,5 ; 28.9,53 41.9,53 cw(c41.9,52.25) 41.898,51.5 ; 28.902,6.5 ccw(c28.9,5.75) 28.9,5 41.9,5 ; 28.902,53 ccw(c28.9,52.25) 28.9,51.5 41.9,51.5 ; 45,46.6 44.9,46.5 45.3,46.9 45.4,47 45.4,54 43.4,56 27.4,56 25.4,54 25.4,47 ; 25.4,47 25.55,46.85 25.5,46.9 25.4,47

## Text inside footprints (layer, text, board x,y; h text height)
U2: Mechanical 13 "PCB EDGE" at 18.15,33.25 h0.81 r270